# Altium PCB Potentiometer_breakout_module.PcbDoc
Units mm, origin at the board's own origin, x right, y up, seen from the top; angles counter-clockwise.
Board outline 7.62 x 9.53 mm, 2 copper layers (Top Layer, Bottom Layer), stack 1.569 mm thick; 2 components, 3 nets, 6 pads, 0 vias.
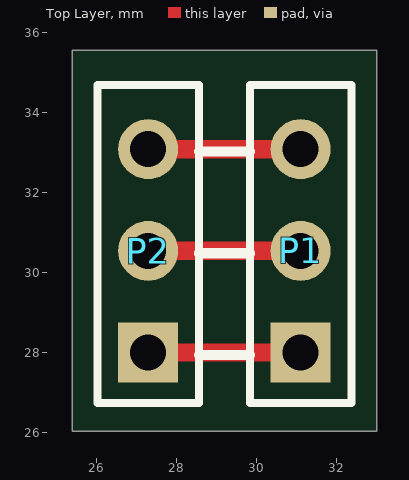
[diagram p0: Top Layer view]
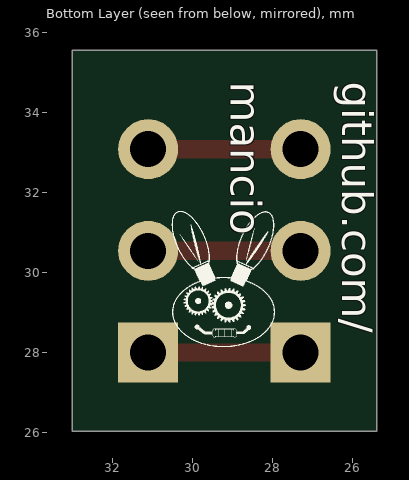
[diagram p1: Bottom Layer view, seen from below]

## Layer stack, top to bottom
Top Solder: solder mask 0.0254, SM-001, Dk 4
Top Layer: signal copper 0.035
Dielectric 1: core 1.4986, Core-043, Dk 4.3
Bottom Layer: signal copper 0.035
Bottom Solder: solder mask 0.0254, SM-001, Dk 4

## Board outline
25.4,26.035 33.02,26.035 33.02,35.56 25.4,35.56

## Design rules (kind name [scope] priority, off if disabled: settings)
Clearance [All] p1: gap=0.254 ignorepadtopadclearanceinfootprint=FALSE except(0: Arc-Hole Track-Hole SMDPad-Hole THPad-Hole Via-Hole Fill-Hole Poly-Hole Region-Hole Text-Hole)
PolygonConnect [All] p1: connectstyle=Relief reliefconductorwidth=0.254 reliefentries=4 polygonreliefangle="90 Angle" airgapwidth=0.254
RoutingVias [All] p1: holewidth=0.711 width=1.27 viastyle="Through Hole" minholewidth=0.711 minwidth=1.27 maxholewidth=0.711 maxwidth=1.27
SolderMaskExpansion [All] p1: expansion=0.102 istentingtop=FALSE
Width [All] p1: maxlimit=0.457 minlimit=0.305 preferedwidth=0.457 minimp=50.000000 maximp=50.000000 favimp=50.000000
30 further rules are at their usual default settings.

## Components (designator, comment, footprint, x,y, rotation, side; value= is the part's Value field where it differs from the comment)
P1 "Header3_Potentiometer" HDR1X3_Potentiometer 31.115,30.48 r90 top
P2 "Header3_Potentiometer" HDR1X3_Potentiometer 27.305,30.48 r90 top

## Footprints (in the part's own frame and the unit in brackets; to place one, negate y for a bottom-side part, rotate by r counter-clockwise, add the part's x,y. Pads: shape width x height; smd on the part's side, far side on the other; paste and mask are expansions set on the pad)
HDR1X3_Potentiometer [mm]
  rect 1.5x1.5 hole 0.9: 1(-2.48,0)
  round 1.5 hole 0.9: 2(0.06,0) 3(2.6,0)
  silkscreen extent -3.75,-1.27 4.2,1.27

## Nets (pads, with @x,y where several pads share a name; then routed paths per layer and width w, separated by ;. In a path a pad name is that pad's centre, name@x,y a point inside that pad or via, vN(x,y) a via of type N, cw(c..) or ccw(c..) an arc to the next point about the centre after c; other vN are vias at no path point)
NetP1_1: P1.1 P2.1 | length 3.8
  Top Layer w0.457: P2.1 P1.1
NetP1_2: P1.2 P2.2 | length 3.8
  Top Layer w0.457: P2.2 P1.2
NetP1_3: P1.3 P2.3 | length 3.8
  Top Layer w0.457: P2.3 P1.3

## Silkscreen, mask and mechanical layers (free items; w line width, h text height)
Top Overlay:
  lines w0.254: 28.575,27.94 29.845,27.94 ; 28.575,30.48 29.845,30.48 ; 28.575,33.02 29.845,33.02
Bottom Overlay:
  drawing of 8 lines, arcs and shapes, not listed
  text "github.com/" at 26.264,34.773 h0.76 r90
  text "mancio" at 29.058,34.773 h0.76 r90
Outline Board:
  the board outline again, w0.254

## Dimensions
25.4,35.56 to 25.4,26.035 on Mechanical 1
27.305,28 to 31.115,28 on Mechanical 1
25.4,35.56 to 33.02,36.83 on Mechanical 1